# Altium PCB PCB1.PcbDoc (part 2 of 2)
Units mil, origin at the board's own origin, x right, y up, seen from the top; angles counter-clockwise.
Board outline 5350 x 4029.88 mil, 2 copper layers (Top Layer, Bottom Layer); 136 components, 72 nets, 358 pads, 1189 vias.
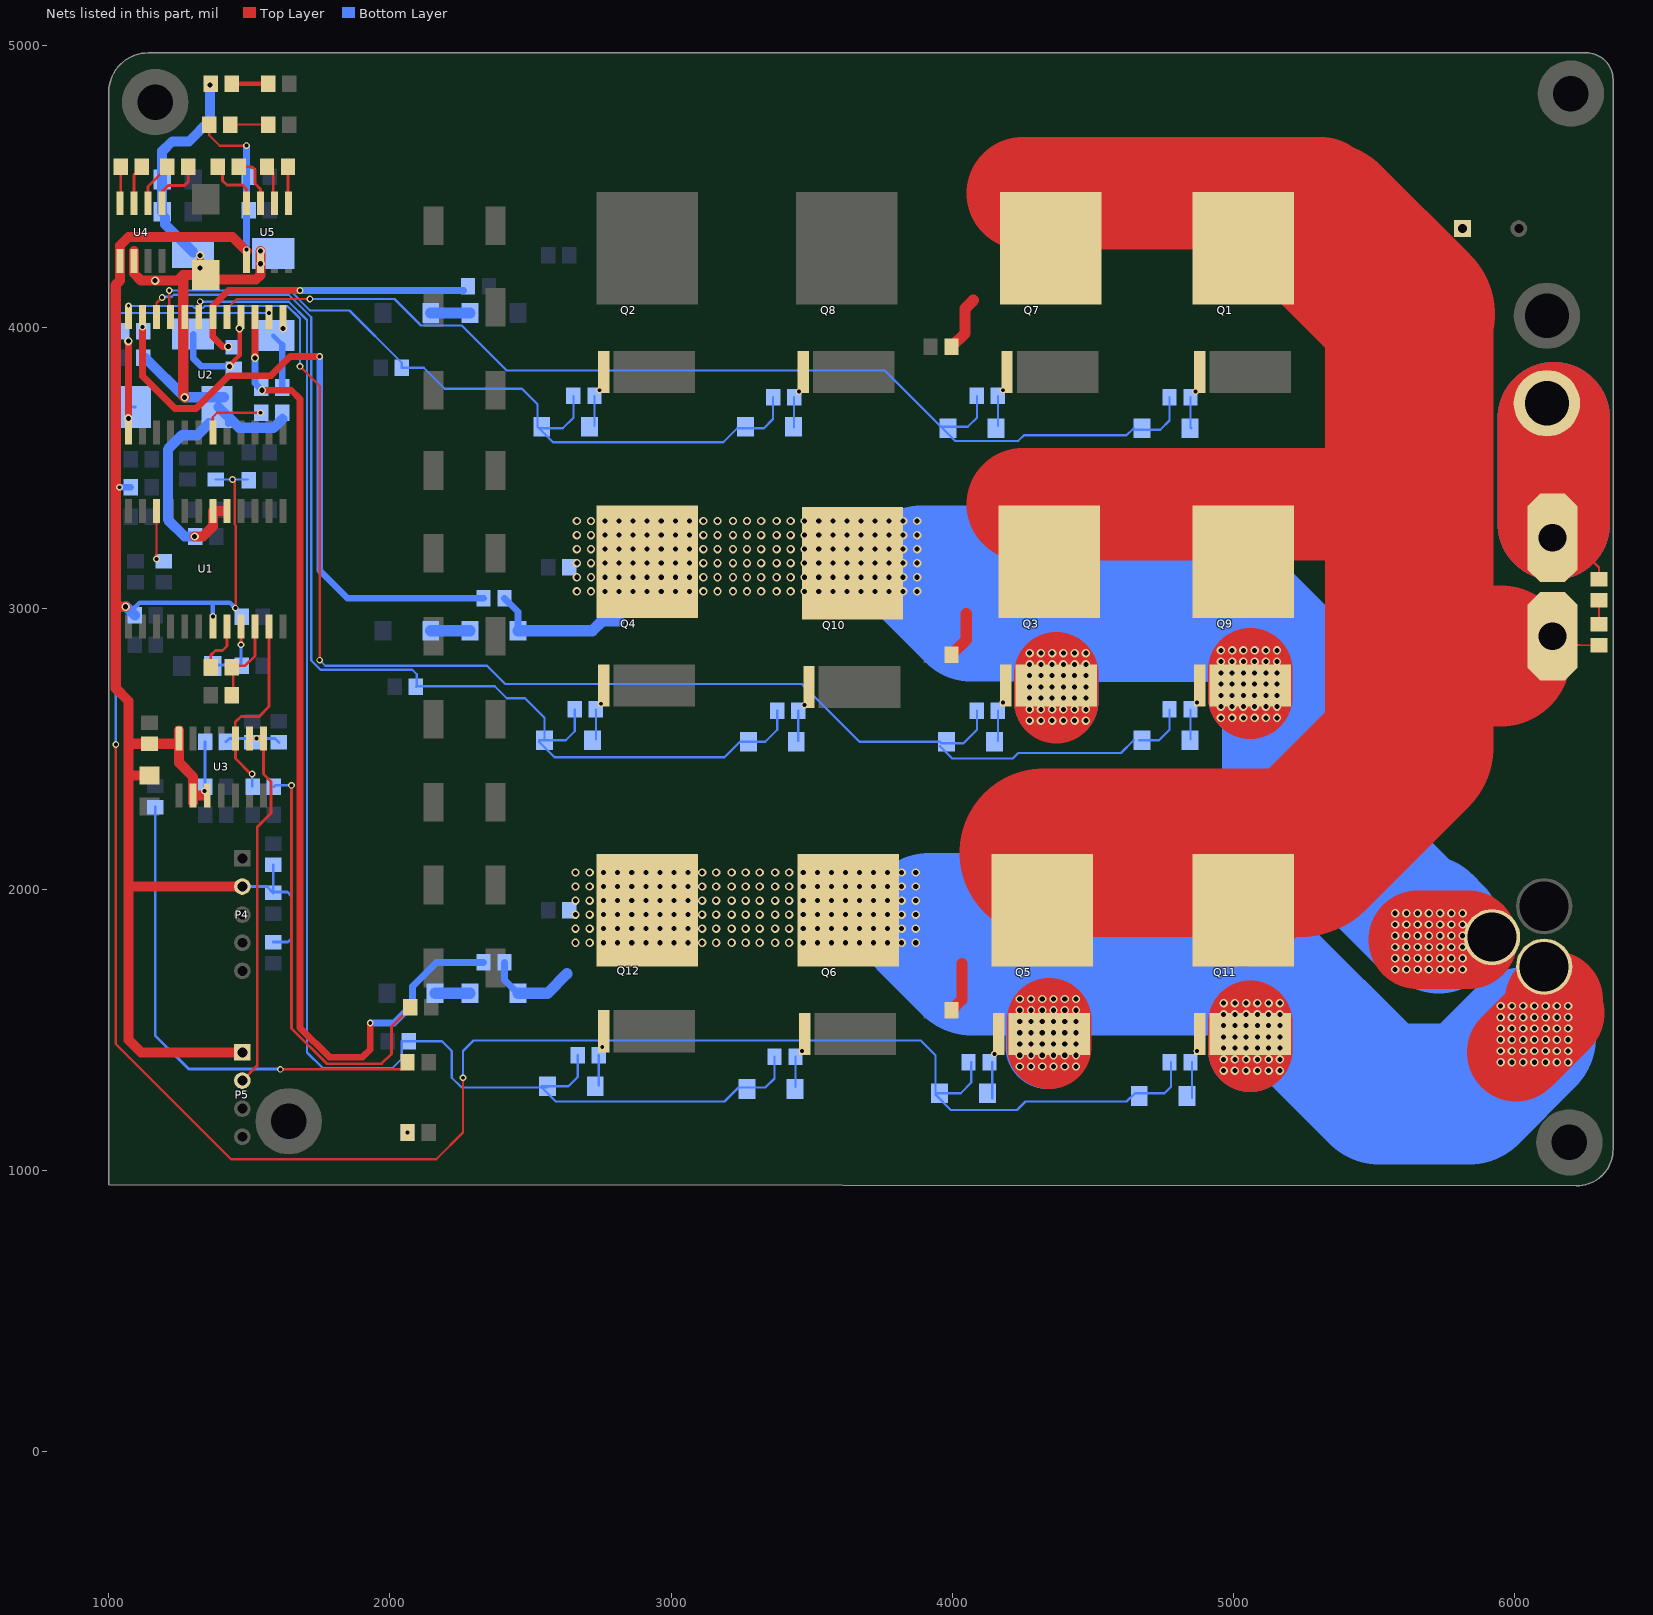
[diagram p2: the nets of this part, all layers, seen from the top]

## Via types
v1: diameter 30, hole 18, Top Layer to Bottom Layer, 995 vias
v2: diameter 24, hole 14, Top Layer to Bottom Layer, 161 vias
v3: diameter 45, hole 28, Top Layer to Bottom Layer, 32 vias
v4: diameter 24, hole 12, Top Layer to Bottom Layer, 1 vias

## Nets (pads, with @x,y where several pads share a name; then routed paths per layer and width w, separated by ;. In a path a pad name is that pad's centre, name@x,y a point inside that pad or via, vN(x,y) a via of type N, cw(c..) or ccw(c..) an arc to the next point about the centre after c; other vN are vias at no path point) (continued)
MV: C27.2 D10.2 P2.1 Q3.0 Q4.2 Q9.0 Q10.2 R60.2 | length 5136.7
  Top Layer w300: Q3.0@4370,2669 Q3.0@4370,2725 Q3.0@4370,2765 ; Q9.0@5060,2684 Q9.0@5060,2725 Q9.0@5060,2780
  Top Layer w350: 5655,1820 P2.1@5835,1820
  Bottom Layer w24: R60.2@2407.4,3035 2455,2987.4 D10.2@2455,2920
  Bottom Layer w40: D10.2@2455,2920 2720,2920 2755,2955 2815,2955
  Bottom Layer w300: 4370,2670 4370,2765 ; 5060,2685 5060,2960
  Bottom Layer w450: v1@5680,1875 5184,2371 5184,2836 5060,2960 ; 5690,1895 5730,1855 ; 5060,2960 4880,3140 3890,3140 4065,2965 4275.62,2963.94 4275.82,2963.94 4276.02,2963.94 4315.62,2963.74 4315.82,2963.74 4316.02,2963.74 4355.62,2963.54 4355.82,2963.54 4356.02,2963.54 4395.62,2963.34 4395.82,2963.34 4396.02,2963.34 4435.62,2963.14 4435.82,2963.14 4436.02,2963.14 4475.62,2962.94 4475.82,2962.94 4476.02,2962.93 4955.56,2960.52 4955.76,2960.52 4955.96,2960.52 4956.16,2960.52 4995.55,2960.32 4995.76,2960.32 4995.96,2960.32 4996.16,2960.32 5035.55,2960.12 5035.75,2960.12 5035.96,2960.12 5036.16,2960.12 5060,2960
  other v1: 5575,1715 5615,1715 5655,1715 5695,1715 5735,1715 5775,1715 5815,1715 5575,1755 5615,1755 5655,1755 5695,1755 5735,1755 5775,1755 5815,1755 5575,1795 5615,1795 5655,1795 5695,1795 5735,1795 5775,1795 5815,1795 5575,1835 5615,1835 5655,1835 5695,1835 5735,1835 5775,1835 5815,1835 5575,1875 5615,1875 5655,1875 5695,1875 5735,1875 5775,1875 5815,1875 5575,1915 5615,1915 5655,1915 5695,1915 5735,1915 5775,1915 5815,1915 4275,2600 4315,2600 4355,2600 4395,2600 4435,2600 4475,2600 4955,2610 4995,2610 5035,2610 5075,2610 5115,2610 5155,2610 4275,2640 4315,2640 4355,2640 4395,2640 4435,2640 4475,2640 4955,2650 4995,2650 5035,2650 5075,2650 5115,2650 5155,2650 4275,2680 4315,2680 4355,2680 4395,2680 4435,2680 4475,2680 4955,2690 4995,2690 5035,2690 5075,2690 5115,2690 5155,2690 4275,2720 4315,2720 4355,2720 4395,2720 4435,2720 4475,2720 4955,2730 4995,2730 5035,2730 5075,2730 5115,2730 5155,2730 4275,2760 4315,2760 4355,2760 4395,2760 4435,2760 4475,2760 4955,2770 4995,2770 5035,2770 5075,2770 5115,2770 5155,2770 4275,2800 4315,2800 4355,2800 4395,2800 4435,2800 4475,2800 4955,2810 4995,2810 5035,2810 5075,2810 5115,2810 5155,2810 4275,2840 4315,2840 4355,2840 4395,2840 4435,2840 4475,2840 4955,2850 4995,2850 5035,2850 5075,2850 5115,2850 5155,2850 2665,3060 2715,3060 2765,3060 2815,3060 2865,3060 2915,3060 2965,3060 3015,3060 3065,3060 3115,3060 3165,3060 3220,3060 3270,3060 3320,3060 3375,3060 3425,3060 3475,3060 3525,3060 3575,3060 3625,3060 3675,3060 3725,3060 3775,3060 3825,3060 3875,3060 2665,3110 2715,3110 2765,3110 2815,3110 2865,3110 2915,3110 2965,3110 3015,3110 3065,3110 3115,3110 3165,3110 3220,3110 3270,3110 3320,3110 3375,3110 3425,3110 3475,3110 3525,3110 3575,3110 3625,3110 3675,3110 3725,3110 3775,3110 3825,3110 3875,3110 2665,3160 2715,3160 2765,3160 2815,3160 2865,3160 2915,3160 2965,3160 3015,3160 3065,3160 3115,3160 3165,3160 3220,3160 3270,3160 3320,3160 3375,3160 3425,3160 3475,3160 3525,3160 3575,3160 3625,3160 3675,3160 3725,3160 3775,3160 3825,3160 3875,3160 2665,3210 2715,3210 2765,3210 2815,3210 2865,3210 2915,3210 2965,3210 3015,3210 3065,3210 3115,3210 3165,3210 3220,3210 3270,3210 3320,3210 3375,3210 3425,3210 3475,3210 3525,3210 3575,3210 3625,3210 3675,3210 3725,3210 3775,3210 3825,3210 3875,3210 2665,3260 2715,3260 2765,3260 2815,3260 2865,3260 2915,3260 2965,3260 3015,3260 3065,3260 3115,3260 3165,3260 3220,3260 3270,3260 3320,3260 3375,3260 3425,3260 3475,3260 3525,3260 3575,3260 3625,3260 3675,3260 3725,3260 3775,3260 3825,3260 3875,3260 2665,3310 2715,3310 2765,3310 2815,3310 2865,3310 2915,3310 2965,3310 3015,3310 3065,3310 3115,3310 3165,3310 3220,3310 3270,3310 3320,3310 3375,3310 3425,3310 3475,3310 3525,3310 3575,3310 3625,3310 3675,3310 3725,3310 3775,3310 3825,3310 3875,3310
MW: C28.2 D17.2 P3.1 Q5.0 Q6.2 Q11.0 Q12.2 R59.2 | length 4736.6
  Top Layer w300: Q5.0@4345,1439 Q5.0@4345,1485 Q5.0@4345,1535 ; Q11.0@5060,1430 Q11.0@5060,1485 Q11.0@5060,1525
  Top Layer w350: 6005,1420 v1@6140,1555 ; 6140,1605 v1@6140,1555 ; 6145,1560 v1@6140,1555
  Bottom Layer w24: R59.2@2407.4,1740 2407.4,1677.6 D17.2@2455,1630
  Bottom Layer w40: D17.2@2455,1630 2560,1630 2630,1700
  Bottom Layer w300: 4340,1440 4340,1566.33 ; 5060,1430 5060,1610
  Bottom Layer w500: v1@6039.93,1474 5837.96,1272.04 5517.96,1272.04 5060,1730 ; 5060,1730 4910,1880 3920,1880 4070,1730 5060,1730
  other v1: 4965,1355 5005,1355 5045,1355 5085,1355 5125,1355 5165,1355 4240,1370 4280,1370 4320,1370 4360,1370 4400,1370 4440,1370 5950,1385 5990,1385 6030,1385 6070,1385 6110,1385 6150,1385 6190,1385 4965,1395 5005,1395 5045,1395 5085,1395 5125,1395 5165,1395 4240,1410 4280,1410 4320,1410 4360,1410 4400,1410 4440,1410 5950,1425 5990,1425 6030,1425 6070,1425 6110,1425 6150,1425 6190,1425 4965,1435 5005,1435 5045,1435 5085,1435 5125,1435 5165,1435 4240,1450 4280,1450 4320,1450 4360,1450 4400,1450 4440,1450 5950,1465 5990,1465 6030,1465 6070,1465 6110,1465 6150,1465 6190,1465 4965,1475 5005,1475 5045,1475 5085,1475 5125,1475 5165,1475 4240,1490 4280,1490 4320,1490 4360,1490 4400,1490 4440,1490 5950,1505 5990,1505 6030,1505 6070,1505 6110,1505 6150,1505 6190,1505 4965,1515 5005,1515 5045,1515 5085,1515 5125,1515 5165,1515 4240,1530 4280,1530 4320,1530 4360,1530 4400,1530 4440,1530 5950,1545 5990,1545 6030,1545 6070,1545 6110,1545 6150,1545 6190,1545 4965,1555 5005,1555 5045,1555 5085,1555 5125,1555 5165,1555 4240,1570 4280,1570 4320,1570 4360,1570 4400,1570 4440,1570 5950,1585 5990,1585 6030,1585 6070,1585 6110,1585 6150,1585 6190,1585 4965,1595 5005,1595 5045,1595 5085,1595 5125,1595 5165,1595 4240,1610 4280,1610 4320,1610 4360,1610 4400,1610 4440,1610 2660,1810 2710,1810 2760,1810 2810,1810 2860,1810 2910,1810 2960,1810 3010,1810 3060,1810 3110,1810 3160,1810 3215,1810 3265,1810 3315,1810 3370,1810 3420,1810 3470,1810 3520,1810 3570,1810 3620,1810 3670,1810 3720,1810 3770,1810 3820,1810 3870,1810 2660,1860 2710,1860 2760,1860 2810,1860 2860,1860 2910,1860 2960,1860 3010,1860 3060,1860 3110,1860 3160,1860 3215,1860 3265,1860 3315,1860 3370,1860 3420,1860 3470,1860 3520,1860 3570,1860 3620,1860 3670,1860 3720,1860 3770,1860 3820,1860 3870,1860 2660,1910 2710,1910 2760,1910 2810,1910 2860,1910 2910,1910 2960,1910 3010,1910 3060,1910 3110,1910 3160,1910 3215,1910 3265,1910 3315,1910 3370,1910 3420,1910 3470,1910 3520,1910 3570,1910 3620,1910 3670,1910 3720,1910 3770,1910 3820,1910 3870,1910 2660,1960 2710,1960 2760,1960 2810,1960 2860,1960 2910,1960 2960,1960 3010,1960 3060,1960 3110,1960 3160,1960 3215,1960 3265,1960 3315,1960 3370,1960 3420,1960 3470,1960 3520,1960 3570,1960 3620,1960 3670,1960 3720,1960 3770,1960 3820,1960 3870,1960 2660,2010 2710,2010 2760,2010 2810,2010 2860,2010 2910,2010 2960,2010 3010,2010 3060,2010 3110,2010 3160,2010 3215,2010 3265,2010 3315,2010 3370,2010 3420,2010 3470,2010 3520,2010 3570,2010 3620,2010 3670,2010 3720,2010 3770,2010 3820,2010 3870,2010 2660,2060 2710,2060 2760,2060 2810,2060 2860,2060 2910,2060 2960,2060 3010,2060 3060,2060 3110,2060 3160,2060 3215,2060 3265,2060 3315,2060 3370,2060 3420,2060 3470,2060 3520,2060 3570,2060 3620,2060 3670,2060 3720,2060 3770,2060 3820,2060 3870,2060
Net5V_2: 5V.2 R40.2 | length 127.6
  Top Layer w8: 5V.2@1440,4720 R40.2@1567.6,4720
Net12V_2: 12V.2 R57.2 | length 130.2
  Top Layer w16: 12V.2@1437.4,4865 R57.2@1567.6,4865
NetC4_1: C4.1 D5.2 U2.16 | length 374.8
  Top Layer w16: v1@1427.5,3862.5 1465,3900 v1(1465,3995)
  Bottom Layer w24: D5.2@1300,3974.33 1300,3890 1330,3860 v1(1430,3860)
NetC4_2: C4.2 R61.1 U2.18 | length 1094.9
  Top Layer w16: U2.18@1370,4035 U2.18@1370,4075
  Top Layer w24: U2.18@1370,4035 1370,3965 1405,3930 v1(1425,3930) ; U2.18@1370,4075 1425,4130 v2(1680,4130)
  Bottom Layer w24: v2(1680,4130) R61.1@2262.6,4130
NetC7_1: C7.1 D12.2 U2.1 | length 283.5
  Top Layer w24: v1(1070,3675) v1(1070,3950)
  Bottom Layer w10: D12.2@1085.81,3715 D12.2@1094.33,3715
NetC7_2: C7.2 R60.1 U2.23 | length 2348.3
  Top Layer w24: U2.23@1120,4035 v2(1120,4000) 1120,3825 1235,3710 1310,3710 1427,3827 1577,3827 1645,3895 v2(1750,3895)
  Bottom Layer w24: v2(1750,3895) 1750,3135 1850,3035 R60.1@2332.6,3035
NetC8_1: C8.1 R20.2 U1.9 | length 234.7
  Top Layer w10: v2(1470,2870) U1.9@1470,2935
  Bottom Layer w10: C8.1@1372.72,2797.6 1470,2797.6 v2(1470,2870)
NetC9_1: C9.1 R21.2 U1.10 | length 297.1
  Top Layer w10: C9.1@1442.4,2695 1442.4,2795 1485,2795 1520,2830 U1.10@1520,2935
NetC12_1: C12.1 U4.1 | length 169.3
  Top Layer w10: U4.1@1183.28,4475 1211.64,4503.36 1268.36,4503.36 1282.4,4517.4 C12.1@1282.4,4570
NetC12_2: C12.2 U4.2 | length 158
  Top Layer w10: U4.2@1140,4440 1140,4500 1207.6,4567.6 C12.2@1207.6,4570
NetC14_1: C14.1 U4.3 | length 141.4
  Top Layer w10: U4.3@1090,4440 1090,4542.6 C14.1@1117.4,4570
NetC14_2: C14.2 U4.4 | length 131.1
  Top Layer w10: U4.4@1040,4440 1042.6,4442.6 C14.2@1042.6,4570
NetC17_1: C17.1 D19.2 U2.13 | length 197.8
  Bottom Layer w16: D19.2@1585,3969.33 D19.2@1617.4,3936.93
  Bottom Layer w24: C17.1@1617.4,3785 D19.2@1617.4,3936.93
  other v1: 1620,3995
NetC17_2: C17.2 R59.1 U2.15 | length 3583.9
  Top Layer w24: v1(1520,3890) U2.15@1520,4035 ; v1(1545,3775) 1649,3775 1680,3744 1680,1507.53 1784.53,1403 1903,1403 1930,1430 v2(1930,1525)
  Bottom Layer w24: v1(1520,3890) 1520,3800 v1(1545,3775) ; v2(1930,1525) 2015,1525 2080,1590 2080,1655 2165,1740 R59.1@2332.6,1740
NetC20_1: C20.1 U5.1 | length 127.4
  Top Layer w10: U5.1@1637.4,4442.6 C20.1@1637.4,4570
NetC20_2: C20.2 U5.2 | length 134.3
  Top Layer w10: C20.2@1562.6,4570 1562.6,4567.4 1585,4545 U5.2@1585,4445
NetC22_1: C22.1 U5.3 | length 190
  Top Layer w10: C22.1@1462.4,4570 1510,4570 1520,4560 1520,4510 1540,4490 U5.3@1540,4440
NetC22_2: C22.2 U5.4 | length 204.6
  Top Layer w10: C22.2@1387.6,4570 1405,4552.6 1405,4520 1420,4505 1475,4505 1490,4490 U5.4@1490,4440
NetD1_1: D1.1 Q7.1 R1.2 | length 107.4
  Bottom Layer w8: D1.1@4162.4,3647.6 R1.2@4162.4,3755
  other v2: 4180,3775
NetD2_1: D2.1 Q1.1 R2.2 | length 111.1
  Bottom Layer w8: R2.2@4847.4,3750 4847.4,3642.6 D2.1@4850,3640
  other v2: 4865,3770
NetD3_1: D3.1 D4.2 | length 140
  Bottom Layer w40: D4.2@2145,4050 D3.1@2285,4050
NetD6_1: D6.1 Q8.1 R6.2 | length 107.4
  Bottom Layer w8: D6.1@3437.4,3642.6 R6.2@3437.4,3750
  other v2: 3455,3770
NetD7_1: D7.1 Q2.1 R7.2 | length 107.4
  Bottom Layer w8: D7.1@2727.4,3647.6 R7.2@2727.4,3755
  other v2: 2745,3775
NetD8_1: D8.1 Q9.1 R16.2 | length 107.4
  Bottom Layer w8: D8.1@4847.4,2532.6 R16.2@4847.4,2640
  other v2: 4870,2665
NetD9_1: D9.1 Q3.1 R17.2 | length 107.6
  Bottom Layer w8: D9.1@4162.4,2527.4 R17.2@4162.4,2635
  other v2: 4180,2665
NetD10_1: D10.1 D11.2 | length 140
  Bottom Layer w40: D11.2@2145,2920 D10.1@2285,2920
NetD13_1: D13.1 Q10.1 R23.2 | length 107.6
  Bottom Layer w8: D13.1@3452.4,2527.4 R23.2@3452.4,2635
  other v2: 3475,2655
NetD14_1: D14.1 Q4.1 R24.2 | length 107.4
  Bottom Layer w8: D14.1@2732.4,2532.6 R24.2@2732.4,2640
  other v2: 2750,2660
NetD15_1: D15.1 Q11.1 R26.2 | length 127.4
  Bottom Layer w8: D15.1@4852.4,1257.6 R26.2@4852.4,1385
  other v2: 4870,1425
NetD16_1: D16.1 Q5.1 R27.2 | length 127.6
  Bottom Layer w8: D16.1@4142.4,1257.4 R27.2@4142.4,1385
  other v2: 4150,1415
NetD17_1: D17.1 D18.2 | length 125
  Bottom Layer w40: D18.2@2160,1630 D17.1@2285,1630
NetD20_1: D20.1 Q12.1 R29.2 | length 107.4
  Bottom Layer w8: D20.1@2742.4,1302.6 R29.2@2742.4,1410
  other v2: 2755,1440
NetD21_1: D21.1 Q6.1 R30.2 | length 107.4
  Bottom Layer w8: D21.1@3442.4,1297.6 R30.2@3442.4,1405
  other v2: 3465,1425
NetDIR_1: DIR.1 R33.1 | length 1747.3
  Top Layer w10: v2(1610,1360) DIR.1@2050,1360
  Bottom Layer w10: R33.1@1165,2292.6 1165,1480 1284.47,1360.53 1609.47,1360.53 v2(1610,1360)
NetF1_2: F1.2 FUSE.1 P6.1 | length 1172.6
  Top Layer w8: F1.2@6075,3250 F1.2@6075,3290 ; F1.2@6135,3301.02 6143.98,3301.02 6300,3145 FUSE.1@6300,3102.4 ; F1.2@6142.6,3182.4 6255,3182.4
  Top Layer w400: F1.2@6140,3301.02 P6.1@6140,3675
  Bottom Layer w400: F1.2@6140,3301.02 P6.1@6140,3675
NetFAULT_1: FAULT.1 R58.1
  other v2: 2062.6,1135
NetFUSE_2: FUSE.2 R41.2 | length 85.2
  Top Layer w8: R41.2@6300,2942.4 FUSE.2@6300,3027.6
NetPWM_1: PWM.1 R32.1 | length 1543.9
  Top Layer w10: v2(1650,2370) 1650,1505 1775,1380 1970,1380 2005,1415 2005,1512.4 PWM.1@2072.6,1580
  Bottom Layer w10: R32.1@1587.4,2365 1592.4,2370 v2(1650,2370)
NetR28_1: R28.1 U2.7 | length 231.2
  Top Layer w8: U2.7@1370,3625 1370,3680 1385,3695 v2(1540,3695)
P\W\M\: C5.1 P5.2 R10.1 R13.1 U3.8 U3.9 | length 1518.8
  Top Layer w10: P5.2@1475,1320 1528,1373 1528,2221.18 1577.42,2270.61 1577.42,2382.83 1550.17,2410.08 U3.8@1550.17,2536.74 v2(1525,2536.74) U3.9@1500.17,2536.74
  Bottom Layer w10: R13.1@1417.4,2525 1429.15,2536.74 v2(1525,2536.74) 1590.85,2536.74 R10.1@1605,2522.6
PHASE: R9.1 U1.22 | length 170
  Top Layer w8: v2(1170,3175) U1.22@1170,3345
PWM: R32.2 U1.11 U3.10 | length 677.7
  Top Layer w10: U3.10@1450,2536.92 1450,2595 1470,2615 1535,2615 1570,2650 U1.11@1570,2935 ; U3.10@1450.17,2536.74 1450.17,2464.83 v2@1505,2410
  Bottom Layer w10: R32.2@1510,2367.6 v2(1510,2410)
UHG: D1.2 D2.2 R1.1 R2.1 U2.17 | length 3924.3
  Top Layer w8: U2.17@1420,4035 1420,4065 1455,4100 v2@1705,4100
  Bottom Layer w8: v2(1715,4100) 2015.86,4100 2110.86,4005 2255,4005 2415,3845 3760,3845 D1.2@3960,3645 ; R1.1@4087.6,3755 4087.6,3677.6 4055,3645 D1.2@3960,3645 ; D2.2@4645,3640 4620,3615 4255,3615 4235,3595 4010,3595 D1.2@3960,3645 ; D2.2@4650,3635 4740,3635 4772.6,3667.6 R2.1@4772.6,3750
ULG: D6.2 D7.2 R6.1 R7.1 R15.2 U2.21 | length 2852.8
  Top Layer w8: v2(1215,4130) 1215,4040 U2.21@1220,4035
  Bottom Layer w8: v2(1215,4130) 1645,4130 1715,4060 1715,4059.8 1716.34,4058.46 1856.54,4058.46 2042.4,3872.6 R15.2@2042.4,3855 2120,3855 2195,3780 2470,3780 2525,3725 2525,3645 D7.2@2530,3640 ; R7.1@2652.6,3755 2652.6,3677.6 2615,3640 D7.2@2530,3640 ; R6.1@3362.6,3750 3362.6,3672.6 3330,3640 3235,3640 3185,3590 2580,3590 D7.2@2530,3640
VCC_5V: 5V.1 C15.1 C16.1 C18.1 C23.1 P4.2 P5.1 R3.2 R5.2 R12.2 R13.2 R18.2 R22.2 R52.2 R53.2 R54.2 R55.2 U1.7 U3.2 U3.3 U3.14 U4.5 U5.5 | length 7045.2
  Top Layer w8: 5V.1@1357.6,4720 1357.6,4682.4 1395,4645 v2(1490,4645) ; v2@1447.75,3449.85 1447.75,3298.36 1452,3294.11 1452,3002 v2(1450,3000)
  Top Layer w36: 1030,3005 v1(1060,3005) ; 1072.4,2517.6 C16.1@1145,2517.6 U3.14@1250.17,2517.6 ; 1074.88,2405.12 C18.1@1145,2405.12 ; U3.14@1250.17,2565 1250.17,2449.83 1300.17,2399.83 U3.2@1300.17,2334.11 U3.2@1300.17,2308.75 ; U3.2@1310,2334.11 U3.3@1340,2334.11 ; P5.1@1475,1420 1115,1420 1070,1465 1070,2010 ; P4.2@1475,2010 1070,2010 ; U5.5@1490,4270 1440,4320 1070,4320 1040,4290 U4.5@1040,4235.28 1040,4165 1025,4150 1025,2715 1070,2670 1070,2010
  Bottom Layer w8: R3.2@1380,3457.6 v2(1440,3457.6) R12.2@1495,3457.6
  Bottom Layer w10: R18.2@1342.6,2365 R13.2@1342.6,2525 ; P4.2@1475,2010 1562.4,2010 R52.2@1585,1987.4 R53.2@1585,2087.6 ; R54.2@1585,1812.4 1637.4,1812.4 1650,1825 1650,1975 1635,1990 R52.2@1587.6,1990
  Bottom Layer w16: R55.2@1092.6,3002.6 1110,3020 1370,3020 ; v2(1370,2970) 1370,3020 ; v2(1450,3000) 1430,3020 1370,3020
  Bottom Layer w24: v2(1038.1,3430) R5.2@1077.6,3430 ; v2(1490,4275) v2(1490,4645)
  Bottom Layer w36: v1(1060,3005) 1062.6,3005 R55.2@1092.6,2975
  other v2: 1340,2350
VCC_12V: 12V.1 C10.1 C11.1 C13.1 C19.1 C21.1 D5.1 D12.1 D19.1 R28.2 U1.17 U1.18 U2.20 U4.6 U5.6 | length 3645.8
  Top Layer w24: v1(1270,3750) U2.20@1270,4035 ; C11.1@1325,4190 v1(1325,4210) v1(1325,4255)
  Top Layer w36: U4.6@1090,4270 1090,4190 1115,4165 v1(1165,4165) 1166,4166 1246,4166 1265,4185 ; v1(1270,3750) 1265,3755 1265,4185 ; v1(1305,3255) 1335,3255 1344,3264 1344,3264.91 1365.09,3286 1366,3286 1370,3290 U1.18@1370,3345 U1.17@1410,3345 ; C11.1@1345,4185 1265,4185 ; C11.1@1355,4165 1358.78,4168.78 1523.78,4168.78 1540,4185 v1(1540,4225) U5.6@1540,4235.28 v1(1540,4270)
  Bottom Layer w16: v1(1305,3255) C10.1@1307.6,3255 ; R28.2@1617.4,3672.4 R28.2@1617.4,3685
  Bottom Layer w24: C19.1@1122.4,3890 C19.1@1130,3890 ; C13.1@1189.88,4410 1189.88,4400.12 C13.1@1200,4390 ; v1(1325,4210) v1(1325,4255) ; D12.1@1385.67,3715 1425,3675.67 D12.1@1425,3657.2
  Bottom Layer w36: C19.1@1130,3890 v1(1270,3750) D12.1@1410,3750 ; C13.1@1189.88,4410 C21.1@1189.88,4525 1189.88,4624.88 1222.89,4657.89 1223.86,4657.89 1225.97,4660 1285,4660 1360,4735 v1(1360,4860) ; C13.1@1200,4390 1200,4365.67 D5.1@1300,4265.67 ; v1(1305,3255) 1270,3255 1210,3315 1210,3565 1260,3615 1315,3615 D12.1@1357.5,3657.5 ; D12.1@1390,3715 1463.53,3641.47 1586.47,3641.47 R28.2@1617.4,3672.4
VCC_24V: C25.1 C29.2 C30.2 C31.2 F1.1 Q1.2 Q3.2 Q5.2 Q7.2 Q9.2 Q11.2 R41.1 | length 7203.2
  Top Layer w8: F1.1@6165,2870 R41.1@6300,2867.6
  Top Layer w40: C29.2@3997.4,1570 4035,1607.6 4035,1735 ; C30.2@3997.4,2835 4050,2887.6 4050,2980 ; C31.2@3997.4,3930 4045,3977.6 4045,4065 4075,4095
  Top Layer w400: 4250,3370 5625,3370 ; Q7.2@4250,4475 5310,4475 ; Q11.2@5035,1925 5240,2130 5380,2130
  Top Layer w500: 5715,2830 5950,2830
  Top Layer w600: 4325,2130 5240,2130 ; 5255,2135 5625,2505 5625,3370 5625,4045 ; 5315,4360 5630,4045
VCC_REF: R21.1 U1.8 | length 183.4
  Top Layer w10: R21.1@1362.6,2790 1362.6,2832.6 1380,2850 1405,2850 1420,2865 U1.8@1420,2935
VHG: D8.2 D9.2 R16.1 R17.1 U2.24 | length 5349.5
  Top Layer w8: v2(1680,3860) 1750,3790 v2(1750,2815)
  Bottom Layer w8: v4(1070,4075) 1298.89,4075 1305.89,4068 1334.11,4068 1341.11,4075 1635,4075 1679.8,4030.2 1680,4030.2 v2(1680,3860) ; v2(1750,2815) 1770,2795 2345,2795 2410,2730 3465,2730 3670,2525 D9.2@3955,2525 ; D9.2@3955,2510 4000,2465 4215,2465 4235,2485 4600,2485 D8.2@4645,2530 ; D9.2@3960,2520 4040,2520 4087.6,2567.6 R17.1@4087.6,2635 ; D8.2@4665,2530 4735,2530 4772.6,2567.6 R16.1@4772.6,2640
VLG: D13.2 D14.2 R23.1 R24.1 R25.2 U2.22 | length 4086.4
  Top Layer w8: U2.22@1170,4035 1170,4085 v2(1190,4105)
  Bottom Layer w8: v2(1190,4105) 1193,4108 1224.11,4108 1231.11,4115 1640,4115 1720,4035 1720,2813.89 1752.89,2781 2079,2781 2095,2765 R25.2@2095,2722.6 ; R25.2@2092.4,2720 R25.2@2095,2722.6 ; D14.2@2530,2525 2585,2470 3190,2470 3245,2525 3335,2525 3377.6,2567.6 R23.1@3377.6,2635 ; D14.2@2530,2530 D14.2@2550,2530 ; R24.1@2657.6,2640 2657.6,2562.6 2625,2530 D14.2@2550,2530 ; R25.2@2095,2722.6 2372.4,2722.6 2415,2680 2480,2680 2550,2610 D14.2@2550,2530
WHG: D15.2 D16.2 R26.1 R27.1 U2.14 | length 7932.3
  Top Layer w8: v2(1025,2515) 1025,1450 1435,1040 2165,1040 2260,1135 v2(2260,1330)
  Bottom Layer w8: v2(1025,2515) 1025,3401.98 1011.1,3415.89 1011.1,4022.76 1038.34,4050 v2(1570,4050) ; v2(2260,1330) 2260,1425 2297,1462 3888,1462 3940,1410 3940,1275 4030,1275 4067.6,1312.6 R27.1@4067.6,1385 ; D16.2@3940,1270 3995,1215 4230,1215 4260,1245 4620,1245 4650,1275 4755,1275 4777.6,1297.6 R26.1@4777.6,1385
WLG: D20.2 D21.2 R29.1 R30.1 R31.2 U2.19 | length 5329.4
  Top Layer w8: U2.19@1320,4035 1315,4040 1325,4050 v2(1325,4090)
  Bottom Layer w8: v2(1325,4090) 1640,4090 1705,4025 1705,1420 1760,1365 2010,1365 2042.4,1397.4 2042.4,1460 2185,1460 2220,1425 2220,1330 2255,1295 D20.2@2560,1295 ; D20.2@2540,1295 2590,1245 3190,1245 3240,1295 3335,1295 3367.6,1327.6 R30.1@3367.6,1405 ; D20.2@2540,1300 2635,1300 2667.6,1332.6 R29.1@2667.6,1410
pads on no net: U1.13 U2.8 U2.9 U3.1
copper on no net:
  other v2: 2740,-385 2765,-385 2790,-385 2895,-385 2920,-385 2945,-385 2740,-360 2765,-360 2790,-360 2895,-360 2920,-360 2945,-360 2740,-315 2765,-315 2790,-315 2895,-315 2920,-315 2945,-315 2740,-290 2765,-290 2790,-290 2895,-290 2920,-290 2945,-290 2740,-245 2765,-245 2790,-245 2895,-245 2920,-245 2945,-245 2740,-220 2765,-220 2790,-220 2895,-220 2920,-220 2945,-220 2740,-180 2765,-180 2790,-180 2895,-180 2920,-180 2945,-180 2740,-155 2765,-155 2790,-155 2895,-155 2920,-155 2945,-155 2740,-110 2765,-110 2790,-110 2895,-110 2920,-110 2945,-110 2740,-85 2765,-85 2790,-85 2895,-85 2920,-85 2945,-85
  other v3: 6195,1011.5 6130,1036.5 6260,1036.5 1640,1086.5 6105,1101.5 6285,1101.5 1575,1111.5 1705,1111.5 6130,1166.5 6260,1166.5 1550,1176.5 1730,1176.5 6195,1191.5 1575,1241.5 1705,1241.5 1640,1266.5 1165,4711.5 1100,4736.5 1230,4736.5 1075,4801.5 1255,4801.5 1100,4866.5 1230,4866.5 1165,4891.5

## Polygon pours and split planes (outlines as drawn)
GND on Bottom Layer "Top Layer" (solid, remove dead copper, pour order 13): 2355,4975 6355,4975 6365,3840 6265,3740 6245,3740 5915,3740 5915,3095 5435,2615 5340,2520 5340,950 1930,950 1945,965 1945,4970
GND on Bottom Layer "Top Layer" (solid, remove dead copper, pour order 12): 1000,4975 2355,4975 2360,4980 2360,950 1000,950
GND on Top Layer "Top Layer" (solid, remove dead copper, pour order 20): 2225,4975 3950,4975 3950,4680 3950,4660 3840,4550 3835,4545 2220,4545
VCC_24V on Top Layer "Top Layer" (solid, remove dead copper, pour order 19): 4050,4075 4050,4975 6350,4975 6350,3245 6215,3110 6035,3110 6210,3110 6215,3110 6045,3110 5920,3235 5325,3830 5325,4080
MW on Top Layer "MW Top Layer" (solid, remove dead copper, pour order 17): 4350,1685 5455,1685 5620,1520 5625,1525 5810,1525 5815,1525 6030,1740 6350,1740 6350,1495 5795,940 5790,945 4200,950 4195,950 4190,950 4195,950 4195,1550
ISENS on Top Layer "Top Layer" (solid, remove dead copper, pour order 16): 3655,1690 2525,1690 2525,1275 2530,1270 2570,1310 3655,1310
ISENS on Top Layer "Top Layer" (solid, remove dead copper, pour order 15): 3650,4045 2555,4045 2550,4040 2550,3665 3645,3665 3650,3670
ISENS on Top Layer "Top Layer" (solid, remove dead copper, pour order 14): 3665,2925 2530,2925 2530,2530 3665,2530
GND on Top Layer "Top Layer" (solid, remove dead copper, pour order 11): 1000,4975 2355,4975 2360,4980 2225,4980 2225,950 2360,950 1000,950

## Other copper
Top Layer:
  rectangle net VCC_24V: 5255,2325 5580,4285
  rectangle net VCC_24V: 4735,1720 5330,2130
  rectangle net VCC_24V: 4020,1720 4765,2130
  rectangle net VCC_24V: 4045,2960 4780,3370
  rectangle net VCC_24V: 4735,2960 5330,3370
  rectangle net VCC_24V: 4740,4075 5335,4485
  rectangle net VCC_24V: 4050,4075 4750,4485
  rectangle net MU: 2615,4075 3330,4485
  rectangle net MU: 3325,4075 3920,4485
  rectangle net MV: 3330,2960 3925,3370
  rectangle net MW: 2615,1720 3335,2130
  rectangle net MW: 3330,1720 3925,2130
  rectangle net MV: 2615,2960 3345,3370
  pour cut-out: 4905,1575 4905,1370 4825,1370 4825,1575
  pour cut-out: 2785,3935 2785,3730 2705,3730 2705,3935
  pour cut-out: 3500,3945 3500,3740 3420,3740 3420,3945
  pour cut-out: 3500,1575 3500,1370 3420,1370 3420,1575
  pour cut-out: 2790,1580 2790,1375 2710,1375 2710,1580
  pour cut-out: 2795,2815 2795,2610 2715,2610 2715,2815
  pour cut-out: 3520,2810 3520,2605 3440,2605 3440,2810
  pour cut-out: 1680,4380 1940,4380 1940,1330 1680,1330
Bottom Layer:
  rectangle net MW: 2625,1625 3920,2130
  rectangle net MV: 2620,2870 3940,3370
  rectangle net MU: 2615,3990 3920,4500
  pour cut-out: 2430,1190 2430,1380 2615,1565 4900,1565 4900,1195 4905,1190
  pour cut-out: 2450,2435 2450,2625 2635,2810 4920,2810 4920,2440 4925,2435
  pour cut-out: 2445,3555 2445,3745 2630,3930 4915,3930 4915,3560 4920,3555
  pour cut-out: 1680,4380 1940,4380 1940,1330 1680,1330

## Silkscreen, mask and mechanical layers (free items; w line width, h text height)
Top Overlay:
  text "HALL     BVACG" at 1545,2185 h40 r270
  text "U" at 5730,1570 h60
  text "V" at 5615,1465 h60
  text "VPDG" at 1535,1455 h40 r270
  text "W" at 5725,1410 h60
  text "Sensored BLDC Driver V1.02" at 4435,1140 h60
Top Solder:
  rectangle: 5255,2325 5580,4285
  rectangle: 4020,1720 4740,2130
  rectangle: 4735,1720 5330,2130
  rectangle: 4735,2960 5330,3370
  rectangle: 4045,2960 4735,3370
  rectangle: 4050,4075 4750,4485
  rectangle: 4740,4075 5335,4485
  rectangle: 3330,1720 3925,2130
  rectangle: 2615,1720 3335,2130
  rectangle: 3330,2955 3925,3365
  rectangle: 2615,2960 3335,3370
  rectangle: 3325,4075 3920,4485
  rectangle: 2615,4075 3330,4485
  lines w290: 2940,2580 2940,2780 ; 3650,2450 3670,2470 3670,2770
  lines w295: 2940,1390 2940,1540 ; 2940,3735 2945,3900 ; 3650,3590 3650,3895
  lines w296: 3655,1215 3655,1530
  lines w300: 2440,1215 2440,4320 ; 2515,3580 3640,3580 ; 4345,1439 4345,1535 ; 4370,2669 4370,2765 ; 4375,3804 4375,3900 ; 5060,1430 5060,1525 ; 5060,2680 5060,2775 ; 5060,3789 5060,3885
  lines w350: 5655,1820 5835,1820 ; 6005,1420 6145,1560 6145,1610 ; 6135,2060 6135,2265
  lines w400: 2035,1827.36 2035,4445 2340,4750 3740,4750 ; 2485,1160 3600,1160 ; 2490,2405 3615,2405 ; 4245,3370 5655,3370 ; 4250,4480 5295,4480 ; 6140,3291.02 6140,3665
  lines w500: 5715,2830 5950,2830
  lines w600: 4325,2130 5240,2130 ; 5255,2135 5625,2505 5625,3370 5625,4045 ; 5315,4360 5630,4045
Bottom Solder:
  rectangle: 2625,1625 3920,2130
  rectangle: 2620,2870 3940,3370
  rectangle: 2615,3990 3920,4500
  lines w300: 4345,1445 4345,1540 ; 4370,2670 4370,2765 ; 4375,3805 4375,3900 ; 5060,1430 5060,1525 ; 5060,2775 5060,2685 5060,2780 ; 5060,3785 5060,3890
  lines w400: 2580,4750 5840,4750 6120,4470 6120,4095 ; 6140,3301.02 6140,3675
  lines w450: 3885,3145 4875,3145 ; 3890,3140 4065,2965 5060,2960 ; 4880,3140 5060,2960 ; 5680,1875 5640,1915 5184,2371 5184,2836 5060,2960 ; 5690,1895 5730,1855
  lines w500: 4135,4230 4270,4095 5295,4095 ; 4135,4250 5160,4250 ; 5160,4230 5295,4095 ; 6039.93,1474 5837.96,1272.04 5517.96,1272.04 5060,1730 ; 6080,2385 5665,2800 5665,3725 5295,4095 ; 6095,2180 6095,2375 ; 5060,1730 4910,1880 3920,1880 4070,1730 5060,1730
  lines w510: 3900,4245 4130,4245

## Text inside footprints (layer, text, board x,y; h text height)
C25: Top Overlay "+" at 5735,4320 h60
P6: Top Overlay "+" at 6198,3648 h60 r270